# Altium PCB Atmel AVR consumer electronics control board.PcbDoc (part 1 of 4)
Units mm, origin at the board's own origin, x right, y up, seen from the top; angles counter-clockwise.
Board outline 310.13 x 89.13 mm, 2 copper layers (Top Layer, Top, Bottom Layer, Bottom); 455 components, 162 nets, 940 pads, 0 vias.
Unrouted connection lines stored in the file: 21.
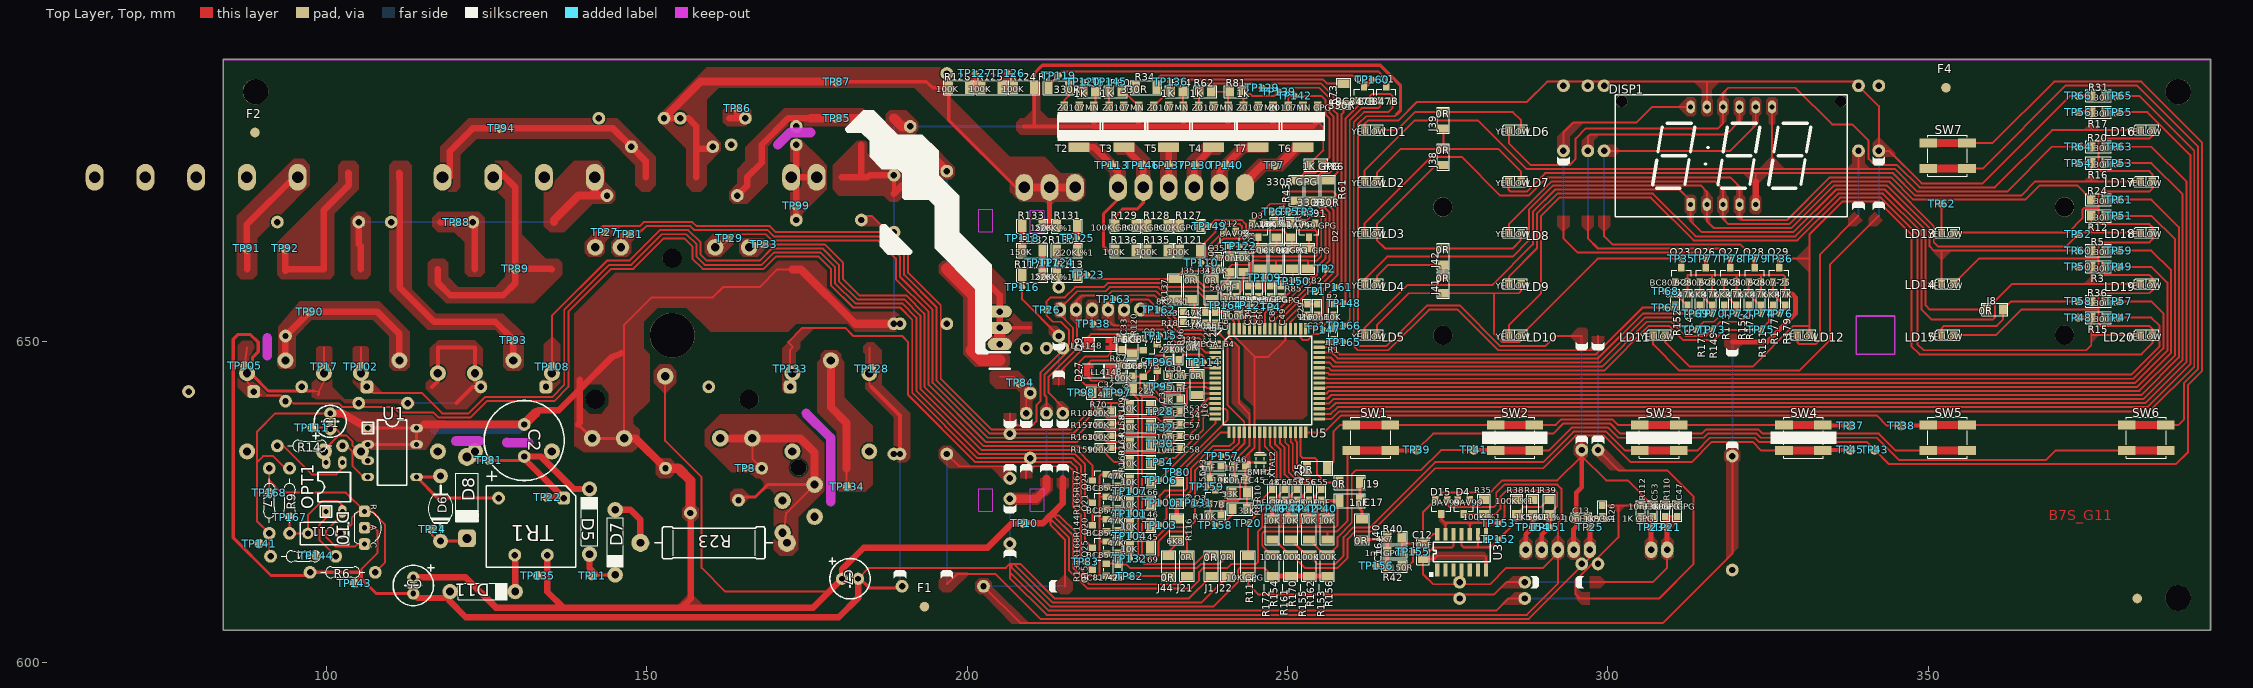
[diagram p0: Top Layer, Top view]
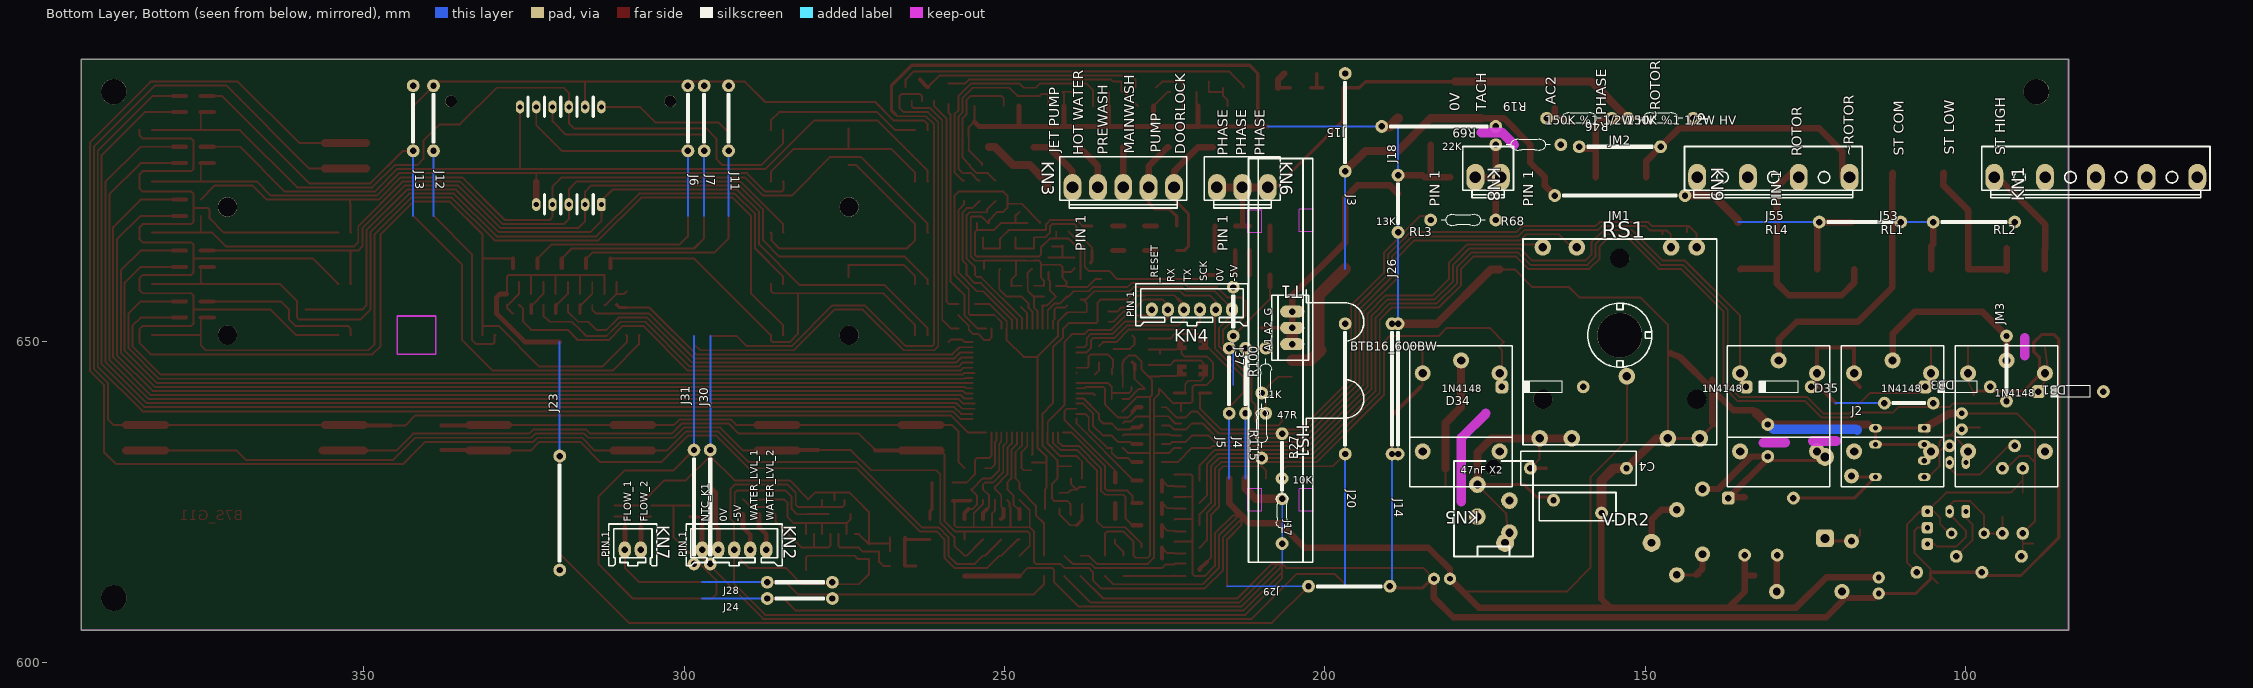
[diagram p1: Bottom Layer, Bottom view, seen from below]

## Layer stack, top to bottom
Top Solder, Top Mask: solder mask 0.0102, Solder Resist, Dk 3.5
Top Layer, Top: signal copper 0.0356
Dielectric 1: dielectric 0.32, FR-4, Dk 4.8
Bottom Layer, Bottom: signal copper 0.0356
Bottom Solder, Bot Mask: solder mask 0.0102, Solder Resist, Dk 3.5

## Board outline
83.936,605 84,604.936 394,604.936 394.063,605 394.063,694 394,694.063 84,694.063 83.936,694

## Design rules (kind name [scope] priority, off if disabled: settings)
Clearance [All] p1: gap=0.254 ignorepadtopadclearanceinfootprint=FALSE except(0: Arc-Hole Track-Hole SMDPad-Hole THPad-Hole Via-Hole Fill-Hole Poly-Hole Region-Hole Text-Hole; 0.305: Arc-Arc Arc-Track Arc-THPad Arc-Via Track-Track Track-THPad Track-Via THPad-THPad THPad-Via Via-Via)
PlaneClearance [All] p1: clearance=0.254
PolygonConnect PolygonConnect_126 [IsPolygon And InNet('JET_POMPASI') And OnLayer('Top Layer, Top') vs IsVia] p1: connectstyle=Direct reliefconductorwidth=0.381 reliefentries=4 polygonreliefangle="90 Angle" airgapwidth=0.254
PolygonConnect PolygonConnect_125 [IsPolygon And InNet('JET_POMPASI') And OnLayer('Top Layer, Top') vs IsPad] p2: connectstyle=Direct reliefconductorwidth=0.381 reliefentries=4 polygonreliefangle="90 Angle" airgapwidth=0.254
PolygonConnect PolygonConnect_124 [IsPolygon And InNet('DOORLOCK') And OnLayer('Top Layer, Top') vs IsVia] p3: connectstyle=Direct reliefconductorwidth=0.381 reliefentries=4 polygonreliefangle="90 Angle" airgapwidth=0.254
PolygonConnect PolygonConnect_123 [IsPolygon And InNet('DOORLOCK') And OnLayer('Top Layer, Top') vs IsPad] p4: connectstyle=Direct reliefconductorwidth=0.381 reliefentries=4 polygonreliefangle="90 Angle" airgapwidth=0.254
PolygonConnect PolygonConnect_122 [IsPolygon And InNet('STATOR_COM') And OnLayer('Top Layer, Top') vs IsVia] p5: connectstyle=Direct reliefconductorwidth=0.381 reliefentries=4 polygonreliefangle="90 Angle" airgapwidth=0.254
PolygonConnect PolygonConnect_121 [IsPolygon And InNet('STATOR_COM') And OnLayer('Top Layer, Top') vs IsPad] p6: connectstyle=Direct reliefconductorwidth=0.381 reliefentries=4 polygonreliefangle="90 Angle" airgapwidth=0.254
PolygonConnect PolygonConnect_120 [IsPolygon And InNet('STATOR_LOW_SPEED') And OnLayer('Top Layer, Top') vs IsVia] p7: connectstyle=Direct reliefconductorwidth=0.381 reliefentries=4 polygonreliefangle="90 Angle" airgapwidth=0.254
PolygonConnect PolygonConnect_119 [IsPolygon And InNet('STATOR_LOW_SPEED') And OnLayer('Top Layer, Top') vs IsPad] p8: connectstyle=Direct reliefconductorwidth=0.381 reliefentries=4 polygonreliefangle="90 Angle" airgapwidth=0.254
PolygonConnect PolygonConnect_118 [IsPolygon And InNet('STATOR_HIGH_SPEED') And OnLayer('Top Layer, Top') vs IsVia] p9: connectstyle=Direct reliefconductorwidth=0.381 reliefentries=4 polygonreliefangle="90 Angle" airgapwidth=0.254
PolygonConnect PolygonConnect_117 [IsPolygon And InNet('STATOR_HIGH_SPEED') And OnLayer('Top Layer, Top') vs IsPad] p10: connectstyle=Direct reliefconductorwidth=0.381 reliefentries=4 polygonreliefangle="90 Angle" airgapwidth=0.254
PolygonConnect PolygonConnect_116 [IsPolygon And InNet('ROTOR') And OnLayer('Top Layer, Top') vs IsVia] p11: connectstyle=Direct reliefconductorwidth=0.381 reliefentries=4 polygonreliefangle="90 Angle" airgapwidth=0.254
PolygonConnect PolygonConnect_115 [IsPolygon And InNet('ROTOR') And OnLayer('Top Layer, Top') vs IsPad] p12: connectstyle=Direct reliefconductorwidth=0.381 reliefentries=4 polygonreliefangle="90 Angle" airgapwidth=0.254
PolygonConnect PolygonConnect_114 [IsPolygon And InNet('NET00056') And OnLayer('Top Layer, Top') vs IsVia] p13: connectstyle=Direct reliefconductorwidth=0.381 reliefentries=4 polygonreliefangle="90 Angle" airgapwidth=0.254
PolygonConnect PolygonConnect_113 [IsPolygon And InNet('NET00056') And OnLayer('Top Layer, Top') vs IsPad] p14: connectstyle=Direct reliefconductorwidth=0.381 reliefentries=4 polygonreliefangle="90 Angle" airgapwidth=0.254
PolygonConnect PolygonConnect_112 [IsPolygon And InNet('NET00047') And OnLayer('Top Layer, Top') vs IsVia] p15: connectstyle=Direct reliefconductorwidth=0.381 reliefentries=4 polygonreliefangle="90 Angle" airgapwidth=0.254
PolygonConnect PolygonConnect_111 [IsPolygon And InNet('NET00047') And OnLayer('Top Layer, Top') vs IsPad] p16: connectstyle=Direct reliefconductorwidth=0.381 reliefentries=4 polygonreliefangle="90 Angle" airgapwidth=0.254
PolygonConnect PolygonConnect_110 [IsPolygon And InNet('NET00055') And OnLayer('Top Layer, Top') vs IsVia] p17: connectstyle=Direct reliefconductorwidth=0.381 reliefentries=4 polygonreliefangle="90 Angle" airgapwidth=0.254
PolygonConnect PolygonConnect_109 [IsPolygon And InNet('NET00055') And OnLayer('Top Layer, Top') vs IsPad] p18: connectstyle=Direct reliefconductorwidth=0.381 reliefentries=4 polygonreliefangle="90 Angle" airgapwidth=0.254
PolygonConnect PolygonConnect_108 [IsPolygon And InNet('HEATER_P') And OnLayer('Top Layer, Top') vs IsVia] p19: connectstyle=Direct reliefconductorwidth=0.381 reliefentries=4 polygonreliefangle="90 Angle" airgapwidth=0.254
PolygonConnect PolygonConnect_107 [IsPolygon And InNet('HEATER_P') And OnLayer('Top Layer, Top') vs IsPad] p20: connectstyle=Direct reliefconductorwidth=0.381 reliefentries=4 polygonreliefangle="90 Angle" airgapwidth=0.254
PolygonConnect PolygonConnect_106 [IsPolygon And InNet('HOT_WATER') And OnLayer('Top Layer, Top') vs IsVia] p21: connectstyle=Direct reliefconductorwidth=0.381 reliefentries=4 polygonreliefangle="90 Angle" airgapwidth=0.254
PolygonConnect PolygonConnect_105 [IsPolygon And InNet('HOT_WATER') And OnLayer('Top Layer, Top') vs IsPad] p22: connectstyle=Direct reliefconductorwidth=0.381 reliefentries=4 polygonreliefangle="90 Angle" airgapwidth=0.254
PolygonConnect PolygonConnect_104 [IsPolygon And InNet('PREWASH') And OnLayer('Top Layer, Top') vs IsVia] p23: connectstyle=Direct reliefconductorwidth=0.381 reliefentries=4 polygonreliefangle="90 Angle" airgapwidth=0.254
PolygonConnect PolygonConnect_103 [IsPolygon And InNet('PREWASH') And OnLayer('Top Layer, Top') vs IsPad] p24: connectstyle=Direct reliefconductorwidth=0.381 reliefentries=4 polygonreliefangle="90 Angle" airgapwidth=0.254
PolygonConnect PolygonConnect_102 [IsPolygon And InNet('TAHLIYE_POMPASI') And OnLayer('Top Layer, Top') vs IsVia] p25: connectstyle=Direct reliefconductorwidth=0.381 reliefentries=4 polygonreliefangle="90 Angle" airgapwidth=0.254
PolygonConnect PolygonConnect_101 [IsPolygon And InNet('TAHLIYE_POMPASI') And OnLayer('Top Layer, Top') vs IsPad] p26: connectstyle=Direct reliefconductorwidth=0.381 reliefentries=4 polygonreliefangle="90 Angle" airgapwidth=0.254
PolygonConnect PolygonConnect_100 [IsPolygon And InNet('NET00024') And OnLayer('Top Layer, Top') vs IsVia] p27: connectstyle=Direct reliefconductorwidth=0.381 reliefentries=4 polygonreliefangle="90 Angle" airgapwidth=0.254
PolygonConnect PolygonConnect_99 [IsPolygon And InNet('NET00024') And OnLayer('Top Layer, Top') vs IsPad] p28: connectstyle=Direct reliefconductorwidth=0.381 reliefentries=4 polygonreliefangle="90 Angle" airgapwidth=0.254
PolygonConnect PolygonConnect_98 [IsPolygon And InNet('PHASE') And OnLayer('Top Layer, Top') vs IsVia] p29: connectstyle=Direct reliefconductorwidth=0.381 reliefentries=4 polygonreliefangle="90 Angle" airgapwidth=0.254
PolygonConnect PolygonConnect_97 [IsPolygon And InNet('PHASE') And OnLayer('Top Layer, Top') vs IsPad] p30: connectstyle=Direct reliefconductorwidth=0.381 reliefentries=4 polygonreliefangle="90 Angle" airgapwidth=0.254
PolygonConnect PolygonConnect_96 [IsPolygon And InNet('TACHO_K2') And OnLayer('Top Layer, Top') vs IsVia] p31: connectstyle=Direct reliefconductorwidth=0.381 reliefentries=4 polygonreliefangle="90 Angle" airgapwidth=0.254
PolygonConnect PolygonConnect_95 [IsPolygon And InNet('TACHO_K2') And OnLayer('Top Layer, Top') vs IsPad] p32: connectstyle=Direct reliefconductorwidth=0.381 reliefentries=4 polygonreliefangle="90 Angle" airgapwidth=0.254
PolygonConnect PolygonConnect_94 [IsPolygon And InNet('NET00096') And OnLayer('Top Layer, Top') vs IsVia] p33: connectstyle=Direct reliefconductorwidth=0.381 reliefentries=4 polygonreliefangle="90 Angle" airgapwidth=0.254
PolygonConnect PolygonConnect_93 [IsPolygon And InNet('NET00096') And OnLayer('Top Layer, Top') vs IsPad] p34: connectstyle=Direct reliefconductorwidth=0.381 reliefentries=4 polygonreliefangle="90 Angle" airgapwidth=0.254
PolygonConnect PolygonConnect_92 [IsPolygon And InNet('~ROTOR') And OnLayer('Top Layer, Top') vs IsVia] p35: connectstyle=Direct reliefconductorwidth=0.381 reliefentries=4 polygonreliefangle="90 Angle" airgapwidth=0.254
PolygonConnect PolygonConnect_91 [IsPolygon And InNet('~ROTOR') And OnLayer('Top Layer, Top') vs IsPad] p36: connectstyle=Direct reliefconductorwidth=0.381 reliefentries=4 polygonreliefangle="90 Angle" airgapwidth=0.254
PolygonConnect PolygonConnect_90 [IsPolygon And InNet('NET00045') And OnLayer('Top Layer, Top') vs IsVia] p37: connectstyle=Direct reliefconductorwidth=0.381 reliefentries=4 polygonreliefangle="90 Angle" airgapwidth=0.254
PolygonConnect PolygonConnect_89 [IsPolygon And InNet('NET00045') And OnLayer('Top Layer, Top') vs IsPad] p38: connectstyle=Direct reliefconductorwidth=0.381 reliefentries=4 polygonreliefangle="90 Angle" airgapwidth=0.254
PolygonConnect PolygonConnect_88 [IsPolygon And InNet('NET00028') And OnLayer('Top Layer, Top') vs IsVia] p39: connectstyle=Direct reliefconductorwidth=0.381 reliefentries=4 polygonreliefangle="90 Angle" airgapwidth=0.254
PolygonConnect PolygonConnect_87 [IsPolygon And InNet('NET00028') And OnLayer('Top Layer, Top') vs IsPad] p40: connectstyle=Direct reliefconductorwidth=0.381 reliefentries=4 polygonreliefangle="90 Angle" airgapwidth=0.254
PolygonConnect PolygonConnect_86 [IsPolygon And InNet('SUTUN_3') And OnLayer('Top Layer, Top') vs IsVia] p41: connectstyle=Direct reliefconductorwidth=0.381 reliefentries=4 polygonreliefangle="90 Angle" airgapwidth=0.254
PolygonConnect PolygonConnect_85 [IsPolygon And InNet('SUTUN_3') And OnLayer('Top Layer, Top') vs IsPad] p42: connectstyle=Direct reliefconductorwidth=0.381 reliefentries=4 polygonreliefangle="90 Angle" airgapwidth=0.254
PolygonConnect PolygonConnect_84 [IsPolygon And InNet('SUTUN_5') And OnLayer('Top Layer, Top') vs IsVia] p43: connectstyle=Direct reliefconductorwidth=0.381 reliefentries=4 polygonreliefangle="90 Angle" airgapwidth=0.254
PolygonConnect PolygonConnect_83 [IsPolygon And InNet('SUTUN_5') And OnLayer('Top Layer, Top') vs IsPad] p44: connectstyle=Direct reliefconductorwidth=0.381 reliefentries=4 polygonreliefangle="90 Angle" airgapwidth=0.254
PolygonConnect PolygonConnect_82 [IsPolygon And InNet('K_SU_SEVIYE_1') And OnLayer('Top Layer, Top') vs IsVia] p45: connectstyle=Direct reliefconductorwidth=0.381 reliefentries=4 polygonreliefangle="90 Angle" airgapwidth=0.254
PolygonConnect PolygonConnect_81 [IsPolygon And InNet('K_SU_SEVIYE_1') And OnLayer('Top Layer, Top') vs IsPad] p46: connectstyle=Direct reliefconductorwidth=0.381 reliefentries=4 polygonreliefangle="90 Angle" airgapwidth=0.254
PolygonConnect PolygonConnect_80 [IsPolygon And InNet('TX') And OnLayer('Top Layer, Top') vs IsVia] p47: connectstyle=Direct reliefconductorwidth=0.381 reliefentries=4 polygonreliefangle="90 Angle" airgapwidth=0.254
PolygonConnect PolygonConnect_79 [IsPolygon And InNet('TX') And OnLayer('Top Layer, Top') vs IsPad] p48: connectstyle=Direct reliefconductorwidth=0.381 reliefentries=4 polygonreliefangle="90 Angle" airgapwidth=0.254
PolygonConnect PolygonConnect_78 [IsPolygon And InNet('SCK') And OnLayer('Top Layer, Top') vs IsVia] p49: connectstyle=Direct reliefconductorwidth=0.381 reliefentries=4 polygonreliefangle="90 Angle" airgapwidth=0.254
PolygonConnect PolygonConnect_77 [IsPolygon And InNet('SCK') And OnLayer('Top Layer, Top') vs IsPad] p50: connectstyle=Direct reliefconductorwidth=0.381 reliefentries=4 polygonreliefangle="90 Angle" airgapwidth=0.254
PolygonConnect PolygonConnect_76 [IsPolygon And InNet('_RESET') And OnLayer('Top Layer, Top') vs IsVia] p51: connectstyle=Direct reliefconductorwidth=0.381 reliefentries=4 polygonreliefangle="90 Angle" airgapwidth=0.254
PolygonConnect PolygonConnect_75 [IsPolygon And InNet('_RESET') And OnLayer('Top Layer, Top') vs IsPad] p52: connectstyle=Direct reliefconductorwidth=0.381 reliefentries=4 polygonreliefangle="90 Angle" airgapwidth=0.254
PolygonConnect PolygonConnect_74 [IsPolygon And InNet('AC2') And OnLayer('Top Layer, Top') vs IsVia] p53: connectstyle=Direct reliefconductorwidth=0.381 reliefentries=4 polygonreliefangle="90 Angle" airgapwidth=0.254
PolygonConnect PolygonConnect_73 [IsPolygon And InNet('AC2') And OnLayer('Top Layer, Top') vs IsPad] p54: connectstyle=Direct reliefconductorwidth=0.381 reliefentries=4 polygonreliefangle="90 Angle" airgapwidth=0.254
PolygonConnect PolygonConnect_72 [IsPolygon And InNet('P') And OnLayer('Top Layer, Top') vs IsVia] p55: connectstyle=Direct reliefconductorwidth=0.381 reliefentries=4 polygonreliefangle="90 Angle" airgapwidth=0.254
PolygonConnect PolygonConnect_71 [IsPolygon And InNet('P') And OnLayer('Top Layer, Top') vs IsPad] p56: connectstyle=Direct reliefconductorwidth=0.381 reliefentries=4 polygonreliefangle="90 Angle" airgapwidth=0.254
PolygonConnect PolygonConnect_70 [IsPolygon And InNet('_SATIR_2') And OnLayer('Top Layer, Top') vs IsVia] p57: connectstyle=Direct reliefconductorwidth=0.381 reliefentries=4 polygonreliefangle="90 Angle" airgapwidth=0.254
PolygonConnect PolygonConnect_69 [IsPolygon And InNet('_SATIR_2') And OnLayer('Top Layer, Top') vs IsPad] p58: connectstyle=Direct reliefconductorwidth=0.381 reliefentries=4 polygonreliefangle="90 Angle" airgapwidth=0.254
PolygonConnect PolygonConnect_68 [IsPolygon And InNet('NET00006') And OnLayer('Top Layer, Top') vs IsVia] p59: connectstyle=Direct reliefconductorwidth=0.381 reliefentries=4 polygonreliefangle="90 Angle" airgapwidth=0.254
PolygonConnect PolygonConnect_67 [IsPolygon And InNet('NET00006') And OnLayer('Top Layer, Top') vs IsPad] p60: connectstyle=Direct reliefconductorwidth=0.381 reliefentries=4 polygonreliefangle="90 Angle" airgapwidth=0.254
PolygonConnect PolygonConnect_66 [IsPolygon And InNet('NET00016') And OnLayer('Top Layer, Top') vs IsVia] p61: connectstyle=Direct reliefconductorwidth=0.381 reliefentries=4 polygonreliefangle="90 Angle" airgapwidth=0.254
PolygonConnect PolygonConnect_65 [IsPolygon And InNet('NET00016') And OnLayer('Top Layer, Top') vs IsPad] p62: connectstyle=Direct reliefconductorwidth=0.381 reliefentries=4 polygonreliefangle="90 Angle" airgapwidth=0.254
PolygonConnect PolygonConnect_64 [IsPolygon And InNet('NET00077') And OnLayer('Top Layer, Top') vs IsVia] p63: connectstyle=Direct reliefconductorwidth=0.381 reliefentries=4 polygonreliefangle="90 Angle" airgapwidth=0.254
PolygonConnect PolygonConnect_63 [IsPolygon And InNet('NET00077') And OnLayer('Top Layer, Top') vs IsPad] p64: connectstyle=Direct reliefconductorwidth=0.381 reliefentries=4 polygonreliefangle="90 Angle" airgapwidth=0.254
PolygonConnect PolygonConnect_62 [IsPolygon And InNet('NTC') And OnLayer('Top Layer, Top') vs IsVia] p65: connectstyle=Direct reliefconductorwidth=0.381 reliefentries=4 polygonreliefangle="90 Angle" airgapwidth=0.254
PolygonConnect PolygonConnect_61 [IsPolygon And InNet('NTC') And OnLayer('Top Layer, Top') vs IsPad] p66: connectstyle=Direct reliefconductorwidth=0.381 reliefentries=4 polygonreliefangle="90 Angle" airgapwidth=0.254
PolygonConnect PolygonConnect_60 [IsPolygon And InNet('NTC_K1') And OnLayer('Top Layer, Top') vs IsVia] p67: connectstyle=Direct reliefconductorwidth=0.381 reliefentries=4 polygonreliefangle="90 Angle" airgapwidth=0.254
PolygonConnect PolygonConnect_59 [IsPolygon And InNet('NTC_K1') And OnLayer('Top Layer, Top') vs IsPad] p68: connectstyle=Direct reliefconductorwidth=0.381 reliefentries=4 polygonreliefangle="90 Angle" airgapwidth=0.254
PolygonConnect PolygonConnect_58 [IsPolygon And InNet('_ROTARY_4') And OnLayer('Top Layer, Top') vs IsVia] p69: connectstyle=Direct reliefconductorwidth=0.381 reliefentries=4 polygonreliefangle="90 Angle" airgapwidth=0.254
PolygonConnect PolygonConnect_57 [IsPolygon And InNet('_ROTARY_4') And OnLayer('Top Layer, Top') vs IsPad] p70: connectstyle=Direct reliefconductorwidth=0.381 reliefentries=4 polygonreliefangle="90 Angle" airgapwidth=0.254
PolygonConnect PolygonConnect_56 [IsPolygon And InNet('_ROTARY_3') And OnLayer('Top Layer, Top') vs IsVia] p71: connectstyle=Direct reliefconductorwidth=0.381 reliefentries=4 polygonreliefangle="90 Angle" airgapwidth=0.254
PolygonConnect PolygonConnect_55 [IsPolygon And InNet('_ROTARY_3') And OnLayer('Top Layer, Top') vs IsPad] p72: connectstyle=Direct reliefconductorwidth=0.381 reliefentries=4 polygonreliefangle="90 Angle" airgapwidth=0.254
PolygonConnect PolygonConnect_54 [IsPolygon And InNet('_ROTARY_2') And OnLayer('Top Layer, Top') vs IsVia] p73: connectstyle=Direct reliefconductorwidth=0.381 reliefentries=4 polygonreliefangle="90 Angle" airgapwidth=0.254
PolygonConnect PolygonConnect_53 [IsPolygon And InNet('_ROTARY_2') And OnLayer('Top Layer, Top') vs IsPad] p74: connectstyle=Direct reliefconductorwidth=0.381 reliefentries=4 polygonreliefangle="90 Angle" airgapwidth=0.254
PolygonConnect PolygonConnect_52 [IsPolygon And InNet('_ROTARY_1') And OnLayer('Top Layer, Top') vs IsVia] p75: connectstyle=Direct reliefconductorwidth=0.381 reliefentries=4 polygonreliefangle="90 Angle" airgapwidth=0.254
PolygonConnect PolygonConnect_51 [IsPolygon And InNet('_ROTARY_1') And OnLayer('Top Layer, Top') vs IsPad] p76: connectstyle=Direct reliefconductorwidth=0.381 reliefentries=4 polygonreliefangle="90 Angle" airgapwidth=0.254
PolygonConnect PolygonConnect_50 [IsPolygon And InNet('MAINWASH') And OnLayer('Top Layer, Top') vs IsVia] p77: connectstyle=Direct reliefconductorwidth=0.381 reliefentries=4 polygonreliefangle="90 Angle" airgapwidth=0.254
PolygonConnect PolygonConnect_49 [IsPolygon And InNet('MAINWASH') And OnLayer('Top Layer, Top') vs IsPad] p78: connectstyle=Direct reliefconductorwidth=0.381 reliefentries=4 polygonreliefangle="90 Angle" airgapwidth=0.254
PolygonConnect PolygonConnect_48 [IsPolygon And InNet('NET00066') And OnLayer('Top Layer, Top') vs IsVia] p79: connectstyle=Direct reliefconductorwidth=0.381 reliefentries=4 polygonreliefangle="90 Angle" airgapwidth=0.254
PolygonConnect PolygonConnect_47 [IsPolygon And InNet('NET00066') And OnLayer('Top Layer, Top') vs IsPad] p80: connectstyle=Direct reliefconductorwidth=0.381 reliefentries=4 polygonreliefangle="90 Angle" airgapwidth=0.254
PolygonConnect PolygonConnect_46 [IsPolygon And InNet('_SATIR_4') And OnLayer('Top Layer, Top') vs IsVia] p81: connectstyle=Direct reliefconductorwidth=0.381 reliefentries=4 polygonreliefangle="90 Angle" airgapwidth=0.254
PolygonConnect PolygonConnect_45 [IsPolygon And InNet('_SATIR_4') And OnLayer('Top Layer, Top') vs IsPad] p82: connectstyle=Direct reliefconductorwidth=0.381 reliefentries=4 polygonreliefangle="90 Angle" airgapwidth=0.254
PolygonConnect PolygonConnect_44 [IsPolygon And InNet('K_FLOWM_2') And OnLayer('Top Layer, Top') vs IsVia] p83: connectstyle=Direct reliefconductorwidth=0.381 reliefentries=4 polygonreliefangle="90 Angle" airgapwidth=0.254
PolygonConnect PolygonConnect_43 [IsPolygon And InNet('K_FLOWM_2') And OnLayer('Top Layer, Top') vs IsPad] p84: connectstyle=Direct reliefconductorwidth=0.381 reliefentries=4 polygonreliefangle="90 Angle" airgapwidth=0.254
PolygonConnect PolygonConnect_42 [IsPolygon And InNet('K_SU_SEVIYE_2') And OnLayer('Top Layer, Top') vs IsVia] p85: connectstyle=Direct reliefconductorwidth=0.381 reliefentries=4 polygonreliefangle="90 Angle" airgapwidth=0.254
PolygonConnect PolygonConnect_41 [IsPolygon And InNet('K_SU_SEVIYE_2') And OnLayer('Top Layer, Top') vs IsPad] p86: connectstyle=Direct reliefconductorwidth=0.381 reliefentries=4 polygonreliefangle="90 Angle" airgapwidth=0.254
PolygonConnect PolygonConnect_40 [IsPolygon And InNet('RX') And OnLayer('Top Layer, Top') vs IsVia] p87: connectstyle=Direct reliefconductorwidth=0.381 reliefentries=4 polygonreliefangle="90 Angle" airgapwidth=0.254
PolygonConnect PolygonConnect_39 [IsPolygon And InNet('RX') And OnLayer('Top Layer, Top') vs IsPad] p88: connectstyle=Direct reliefconductorwidth=0.381 reliefentries=4 polygonreliefangle="90 Angle" airgapwidth=0.254
PolygonConnect PolygonConnect_38 [IsPolygon And InNet('NET00004') And OnLayer('Top Layer, Top') vs IsVia] p89: connectstyle=Direct reliefconductorwidth=0.381 reliefentries=4 polygonreliefangle="90 Angle" airgapwidth=0.254
PolygonConnect PolygonConnect_37 [IsPolygon And InNet('NET00004') And OnLayer('Top Layer, Top') vs IsPad] p90: connectstyle=Direct reliefconductorwidth=0.381 reliefentries=4 polygonreliefangle="90 Angle" airgapwidth=0.254
PolygonConnect PolygonConnect_36 [IsPolygon And InNet('220_LINE') And OnLayer('Top Layer, Top') vs IsVia] p91: connectstyle=Direct reliefconductorwidth=0.381 reliefentries=4 polygonreliefangle="90 Angle" airgapwidth=0.254
PolygonConnect PolygonConnect_35 [IsPolygon And InNet('220_LINE') And OnLayer('Top Layer, Top') vs IsPad] p92: connectstyle=Direct reliefconductorwidth=0.381 reliefentries=4 polygonreliefangle="90 Angle" airgapwidth=0.254
PolygonConnect PolygonConnect_34 [IsPolygon And InNet('SUTUN_9') And OnLayer('Top Layer, Top') vs IsVia] p93: connectstyle=Direct reliefconductorwidth=0.381 reliefentries=4 polygonreliefangle="90 Angle" airgapwidth=0.254
PolygonConnect PolygonConnect_33 [IsPolygon And InNet('SUTUN_9') And OnLayer('Top Layer, Top') vs IsPad] p94: connectstyle=Direct reliefconductorwidth=0.381 reliefentries=4 polygonreliefangle="90 Angle" airgapwidth=0.254
PolygonConnect PolygonConnect_32 [IsPolygon And InNet('SUTUN_10') And OnLayer('Top Layer, Top') vs IsVia] p95: connectstyle=Direct reliefconductorwidth=0.381 reliefentries=4 polygonreliefangle="90 Angle" airgapwidth=0.254
PolygonConnect PolygonConnect_31 [IsPolygon And InNet('SUTUN_10') And OnLayer('Top Layer, Top') vs IsPad] p96: connectstyle=Direct reliefconductorwidth=0.381 reliefentries=4 polygonreliefangle="90 Angle" airgapwidth=0.254
PolygonConnect PolygonConnect_30 [IsPolygon And InNet('SUTUN_2') And OnLayer('Top Layer, Top') vs IsVia] p97: connectstyle=Direct reliefconductorwidth=0.381 reliefentries=4 polygonreliefangle="90 Angle" airgapwidth=0.254
PolygonConnect PolygonConnect_29 [IsPolygon And InNet('SUTUN_2') And OnLayer('Top Layer, Top') vs IsPad] p98: connectstyle=Direct reliefconductorwidth=0.381 reliefentries=4 polygonreliefangle="90 Angle" airgapwidth=0.254
PolygonConnect PolygonConnect_28 [IsPolygon And InNet('SUTUN_7') And OnLayer('Top Layer, Top') vs IsVia] p99: connectstyle=Direct reliefconductorwidth=0.381 reliefentries=4 polygonreliefangle="90 Angle" airgapwidth=0.254
PolygonConnect PolygonConnect_27 [IsPolygon And InNet('SUTUN_7') And OnLayer('Top Layer, Top') vs IsPad] p100: connectstyle=Direct reliefconductorwidth=0.381 reliefentries=4 polygonreliefangle="90 Angle" airgapwidth=0.254
PolygonConnect PolygonConnect_26 [IsPolygon And InNet('SUTUN_1') And OnLayer('Top Layer, Top') vs IsVia] p101: connectstyle=Direct reliefconductorwidth=0.381 reliefentries=4 polygonreliefangle="90 Angle" airgapwidth=0.254
PolygonConnect PolygonConnect_25 [IsPolygon And InNet('SUTUN_1') And OnLayer('Top Layer, Top') vs IsPad] p102: connectstyle=Direct reliefconductorwidth=0.381 reliefentries=4 polygonreliefangle="90 Angle" airgapwidth=0.254
PolygonConnect PolygonConnect_24 [IsPolygon And InNet('SUTUN_6') And OnLayer('Top Layer, Top') vs IsVia] p103: connectstyle=Direct reliefconductorwidth=0.381 reliefentries=4 polygonreliefangle="90 Angle" airgapwidth=0.254
PolygonConnect PolygonConnect_23 [IsPolygon And InNet('SUTUN_6') And OnLayer('Top Layer, Top') vs IsPad] p104: connectstyle=Direct reliefconductorwidth=0.381 reliefentries=4 polygonreliefangle="90 Angle" airgapwidth=0.254
PolygonConnect PolygonConnect_22 [IsPolygon And InNet('SUTUN_4') And OnLayer('Top Layer, Top') vs IsVia] p105: connectstyle=Direct reliefconductorwidth=0.381 reliefentries=4 polygonreliefangle="90 Angle" airgapwidth=0.254
PolygonConnect PolygonConnect_21 [IsPolygon And InNet('SUTUN_4') And OnLayer('Top Layer, Top') vs IsPad] p106: connectstyle=Direct reliefconductorwidth=0.381 reliefentries=4 polygonreliefangle="90 Angle" airgapwidth=0.254
PolygonConnect PolygonConnect_20 [IsPolygon And InNet('SUTUN_8') And OnLayer('Top Layer, Top') vs IsVia] p107: connectstyle=Direct reliefconductorwidth=0.381 reliefentries=4 polygonreliefangle="90 Angle" airgapwidth=0.254
PolygonConnect PolygonConnect_19 [IsPolygon And InNet('SUTUN_8') And OnLayer('Top Layer, Top') vs IsPad] p108: connectstyle=Direct reliefconductorwidth=0.381 reliefentries=4 polygonreliefangle="90 Angle" airgapwidth=0.254
PolygonConnect PolygonConnect_18 [IsPolygon And InNet('_SATIR_3') And OnLayer('Top Layer, Top') vs IsVia] p109: connectstyle=Direct reliefconductorwidth=0.381 reliefentries=4 polygonreliefangle="90 Angle" airgapwidth=0.254
PolygonConnect PolygonConnect_17 [IsPolygon And InNet('_SATIR_3') And OnLayer('Top Layer, Top') vs IsPad] p110: connectstyle=Direct reliefconductorwidth=0.381 reliefentries=4 polygonreliefangle="90 Angle" airgapwidth=0.254
PolygonConnect PolygonConnect_16 [IsPolygon And InNet('-5V') And OnLayer('Top Layer, Top') vs IsVia] p111: connectstyle=Direct reliefconductorwidth=0.381 reliefentries=4 polygonreliefangle="90 Angle" airgapwidth=0.254
PolygonConnect PolygonConnect_15 [IsPolygon And InNet('-5V') And OnLayer('Top Layer, Top') vs IsPad] p112: connectstyle=Direct reliefconductorwidth=0.381 reliefentries=4 polygonreliefangle="90 Angle" airgapwidth=0.254
PolygonConnect PolygonConnect_14 [IsPolygon And InNet('_SATIR_1') And OnLayer('Top Layer, Top') vs IsVia] p113: connectstyle=Direct reliefconductorwidth=0.381 reliefentries=4 polygonreliefangle="90 Angle" airgapwidth=0.254
PolygonConnect PolygonConnect_13 [IsPolygon And InNet('_SATIR_1') And OnLayer('Top Layer, Top') vs IsPad] p114: connectstyle=Direct reliefconductorwidth=0.381 reliefentries=4 polygonreliefangle="90 Angle" airgapwidth=0.254
PolygonConnect PolygonConnect_12 [IsPolygon And InNet('K_FLOWM_1') And OnLayer('Top Layer, Top') vs IsVia] p115: connectstyle=Direct reliefconductorwidth=0.381 reliefentries=4 polygonreliefangle="90 Angle" airgapwidth=0.254
PolygonConnect PolygonConnect_11 [IsPolygon And InNet('K_FLOWM_1') And OnLayer('Top Layer, Top') vs IsPad] p116: connectstyle=Direct reliefconductorwidth=0.381 reliefentries=4 polygonreliefangle="90 Angle" airgapwidth=0.254
PolygonConnect PolygonConnect_10 [IsPolygon And InNet('NET00000') And OnLayer('Top Layer, Top') vs IsVia] p117: connectstyle=Direct reliefconductorwidth=0.381 reliefentries=4 polygonreliefangle="90 Angle" airgapwidth=0.254
PolygonConnect PolygonConnect_9 [IsPolygon And InNet('NET00000') And OnLayer('Top Layer, Top') vs IsPad] p118: connectstyle=Direct reliefconductorwidth=0.381 reliefentries=4 polygonreliefangle="90 Angle" airgapwidth=0.254
PolygonConnect PolygonConnect_8 [IsPolygon And InNet('NET00035') And OnLayer('Top Layer, Top') vs IsVia] p119: connectstyle=Direct reliefconductorwidth=0.381 reliefentries=4 polygonreliefangle="90 Angle" airgapwidth=0.254
PolygonConnect PolygonConnect_7 [IsPolygon And InNet('NET00035') And OnLayer('Top Layer, Top') vs IsPad] p120: connectstyle=Direct reliefconductorwidth=0.381 reliefentries=4 polygonreliefangle="90 Angle" airgapwidth=0.254
PolygonConnect PolygonConnect_6 [IsPolygon And InNet('NET00017') And OnLayer('Top Layer, Top') vs IsVia] p121: connectstyle=Direct reliefconductorwidth=0.381 reliefentries=4 polygonreliefangle="90 Angle" airgapwidth=0.254
PolygonConnect PolygonConnect_5 [IsPolygon And InNet('NET00017') And OnLayer('Top Layer, Top') vs IsPad] p122: connectstyle=Direct reliefconductorwidth=0.381 reliefentries=4 polygonreliefangle="90 Angle" airgapwidth=0.254
PolygonConnect PolygonConnect_4 [IsPolygon And InNet('NET00074') And OnLayer('Top Layer, Top') vs IsVia] p123: connectstyle=Direct reliefconductorwidth=0.381 reliefentries=4 polygonreliefangle="90 Angle" airgapwidth=0.254
PolygonConnect PolygonConnect_3 [IsPolygon And InNet('NET00074') And OnLayer('Top Layer, Top') vs IsPad] p124: connectstyle=Direct reliefconductorwidth=0.381 reliefentries=4 polygonreliefangle="90 Angle" airgapwidth=0.254
PolygonConnect PolygonConnect_2 [IsPolygon And InNet('0V') And OnLayer('Top Layer, Top') vs IsVia] p125: connectstyle=Direct reliefconductorwidth=0.381 reliefentries=4 polygonreliefangle="90 Angle" airgapwidth=0.254
PolygonConnect PolygonConnect_1 [IsPolygon And InNet('0V') And OnLayer('Top Layer, Top') vs IsPad] p126: connectstyle=Direct reliefconductorwidth=0.381 reliefentries=4 polygonreliefangle="90 Angle" airgapwidth=0.254
PolygonConnect [All] p127: connectstyle=Relief reliefconductorwidth=0.254 reliefentries=4 polygonreliefangle="90 Angle" airgapwidth=0.254
RoutingVias [All] p1: holewidth=0.711 width=1.27 viastyle="Through Hole" minholewidth=0.711 minwidth=1.27 maxholewidth=0.711 maxwidth=1.27
SolderMaskExpansion [All] p1: expansion=0.102
Width [All] p1: maxlimit=0.254 minlimit=0.254 preferedwidth=0.254
29 further rules are at their usual default settings.

## Components (designator, comment, footprint, x,y, rotation, side; value= is the part's Value field where it differs from the comment)
C1 "10UF 25V M85" "CER F2.5 D5 H11_Radial" 100.647,638.81 r270 top
C2 "10uF 450V 105C HRL" "CER F5 D12.5 H25" 130.909,637.07 r270 top
C4 "47nF X2" "CFR F15 L18 B5.3 H11_Primary" 167.957,630.237 r180 bottom
C5 "220UF 16V M105" "CER F2.5 D6.3 H11_Primary" 113.6,610.7 r90 top
C6 "100nF" C_0603 242.316,654.24 r180 top
C7 "220UF 16V M105" "CER F2.5 D6.3 H11_Primary" 183,613 r180 top
C8 "10nF GPG" C_0603 247.332,656.908 r90 top
C10 "10nF" C_0603 243.84,656.908 r90 top
C11 "100nF 63V 5%" "CFR F5 L7.5 B3.5 H12.5_Vertical" 102.235,620.077 r180 top
C12 "10nF" C_0805_SIE_0805 271.145,618.49 r270 top
C13 "10nF GPG" C_0603 296.863,622.617 r180 top
C15 "560pF" C_0603 240.347,658.812 r270 top
C16 "1nF GPG" C_0805_SIE_0805 265.43,617.22 r0 top
C17 "1nF" C_1206_SIE_1206 261.303,625.158 r180 top
C23 "100nF" C_0603 237.172,652.78 r90 top
C27 "100nF" C_0603 254.635,654.05 r90 top
C28 "1nF" C_0603 238.76,652.78 r90 top
C29 "1nF" C_0603 253.047,654.05 r90 top
C30 "10nF" C_0603 233.362,644.842 r180 top
C31 "1nF" C_0603 233.362,642.938 r180 top
C32 "100nF" C_0603 225.742,646.43 r270 top
C33 "1nF" C_0603 224.155,650.558 r270 top
C34 "10nF" C_0603 241.935,656.908 r90 top
C35 "470nF" C_0805_SIE_0805 240.982,663.257 r270 top
C43 "1nF" C_0603 237.807,630.555 r0 top
C45 "100nF" C_0603 241.617,628.65 r0 top
C46 "1nF" C_0603 241.617,630.555 r0 top
C47 "10nF GPG" C_0603 310.832,624.522 r270 top
C48 "1nF GPG" C_0603 247.65,625.158 r90 top
C49 "560pF GPG" C_0603 248.92,656.908 r90 top
C50 "560pF" C_0603 245.427,656.908 r90 top
C53 "10nF GPG" C_0603 307.022,624.522 r270 top
C54 "10nF" C_0603 231.457,639.127 r0 top
C55 "10nF" C_0603 255.27,625.158 r90 top
C56 "10nF" C_0603 253.365,625.158 r90 top
C57 "10nF" C_0603 231.457,637.222 r0 top
C58 "10nF" C_0603 231.457,633.413 r0 top
C59 "10nF" C_0603 251.46,625.158 r90 top
C60 "10nF" C_0603 231.457,635.317 r0 top
C61 "10nF" C_0603 249.555,625.158 r90 top
D2 "BAV99 GPG" SOT_23(AKC)_IPC_210 254.317,668.337 r180 top
D3 "BAV99" SOT_23(AKC)_IPC_210 246.38,668.337 r180 top
D4 "BAV99" SOT_23(AKC)_IPC_210 278.447,625.158 r180 top
D5 "1N4007" DO_41_400_MIL 141.1,627 r270 top
D6 "GPG" SOD_57_400_MIL 117.856,618.871 r90 top
D7 "1N4007" DO_41_400_MIL 145.1,613.6 r90 top
D8 "GPG" DO_15_500_MIL 121.983,619.315 r90 top
D9 "LL4148" MINI_MELF_POL_Detent 219.075,649.605 r0 top
D10 "TL431 %1" TO_92(RAC) 106,623.5 r270 top
D11 "SB160" DO_41_400_MIL 129.5,611 r180 top
D12 "BAV99" SOT_23(AKC)_IPC_210 241.935,667.067 r180 top
D15 "BAV99" SOT_23(AKC)_IPC_210 274.955,625.158 r180 top
D27 "LL4148" MINI_MELF_POL_Detent 222.25,645.477 r180 top
D31 "1N4148" DO_35_400_MIL 88.7,642.2 r180 bottom
D33 "1N4148" DO_35_400_MIL 106.362,642.938 r180 bottom
D34 "1N4148" DO_35_500_MIL 172.403,642.938 r180 bottom
D35 "1N4148" DO_35_400_MIL 134.302,642.938 r180 bottom
DISP1 "3HSY81421B AMBER" "3HSY81426B4_3HSY81426B4 AMB(Primary)" 312.9,671.38 r0 top locked
F1 "FIDUCIAL_1.5_3R" FIDUCIAL_1.5_3R 193.357,608.647 r0 top
F2 "FIDUCIAL_1.5_3R" FIDUCIAL_1.5_3R 88.9,682.625 r0 top
F4 "FIDUCIAL_1.5_3R" FIDUCIAL_1.5_3R 352.743,689.61 r0 top
HS1 "*" HS_63_10_Z0 201.93,647.065 r180 bottom locked
J1 "0R" J_1206 238.125,616.585 r270 top
J2 "0R" JMP_300 112.712,640.397 r180 bottom
J3 "0R" JMP_600_600_MIL 196.85,676.592 r90 bottom
J4 "0R" JMP_400 212.407,638.81 r90 bottom
J5 "0R" JMP_400 214.947,638.81 r90 bottom
J6 "0R" JMP_400 299.402,679.767 r90 bottom
J7 "0R" JMP_400 296.863,679.767 r90 bottom
J8 "0R" J_0805 359.092,655.002 r0 top
J9 "0R" J_1206 232.727,624.84 r90 top
J11 "0R" JMP_400 293.053,679.767 r90 bottom
J12 "0R" JMP_400 339.09,679.767 r90 bottom
J13 "0R" JMP_400 342.265,679.767 r90 bottom
J14 "0R" JMP_800 189.547,632.46 r90 bottom
J15 "0R" JMP_700 191.135,683.577 r180 bottom
J16 "0R" J_1206 235.903,644.842 r270 top
J17 "0R" JMP_400 206.692,625.475 r90 bottom
J18 "0R" JMP_350 188.595,675.957 r270 bottom
J19 "0R" J_1206 258.127,628.015 r0 top
J20 "0R" JMP_800 196.85,632.46 r90 bottom
J21 "0R" J_1206 234.315,616.585 r270 top
J22 "0R" J_1206 240.665,616.585 r270 top
J23 "0R" JMP_700 319.405,632.142 r270 bottom
J24 "0R" JMP_400 287.02,609.918 r180 bottom
J25 "0R" J_1206 253.047,630.237 r0 top
J26 "0R" JMP_800 188.595,652.78 r270 bottom
J28 "GPG" JMP_400 287.02,612.457 r180 bottom
J29 "0R" JMP_500 202.565,611.822 r180 bottom
J30 "0R" JMP_700 295.91,633.095 r270 bottom
J31 "0R" JMP_700 298.45,633.095 r270 bottom
J33 "0R" J_0805 235.267,649.288 r270 top
J34 "0R" J_1206 238.125,659.765 r270 top
J35 "0R" J_1206 234.95,659.765 r270 top
J37 "0R" JMP_300 214.312,650.875 r90 bottom
J38 "0R" J_0805 274.32,680.085 r270 top
J39 "0R" J_0805 274.32,685.8 r270 top
J40 "0R" J_1206 261.62,619.125 r90 top
J41 "0R" J_0805 274.32,660.082 r270 top
J42 "0R" J_0805 274.32,664.527 r270 top
J44 "0R" J_1206 231.457,613.41 r90 top
J53 "0R" JMP_500 105.093,668.655 r180 bottom
J55 "0R" JMP_500 122.872,668.655 r180 bottom
JM1 "0R" JMP_800 164.147,672.783 r180 bottom
JM2 "0R" JMP_500 160.338,680.402 r180 bottom
JM3 "0R" JMP_400 93.662,650.875 r270 bottom
KN1 "35979_0510" 35979_5 95.567,675.64 r180 bottom locked
KN2 "35312_0560" 35312_5 297.18,617.538 r180 bottom
KN3 "35978_0510" 35978_5 239.395,674.053 r180 bottom locked
KN4 "35312_0660" 35312_6 227.012,655.002 r180 bottom
KN5 "91999_0499" 91999_2_91999_0499(Primary) 176.213,627.697 r180 bottom
KN6 "35978_0310" 35978_3 216.852,674.053 r180 bottom locked
KN7 "35312_0260 GPG" 35312_2 309.245,617.538 r180 bottom
KN8 "35978_0210" 35978_2 176.53,675.64 r180 bottom locked
KN9 "35979_0410" 35979_4 141.922,675.64 r180 bottom locked
LD1 "YELLOW" LTST_0805_N 263,683 r0 top locked
LD2 "YELLOW" LTST_0805_N 263,675 r0 top locked
LD3 "YELLOW" LTST_0805_N 263,667 r0 top locked
LD4 "YELLOW" LTST_0805_N 263,659 r0 top locked
LD5 "YELLOW" LTST_0805_N 263,651 r0 top locked
LD6 "YELLOW" LTST_0805_N 285.5,683 r0 top locked
LD7 "YELLOW" LTST_0805_N 285.5,675 r0 top locked
LD8 "YELLOW" LTST_0805_N 285.5,667 r0 top locked
LD9 "YELLOW" LTST_0805_N 285.5,659 r0 top locked
LD10 "YELLOW" LTST_0805_N 285.5,651 r0 top locked
LD11 "YELLOW" LTST_0805_N 308,651 r0 top locked
LD12 "YELLOW" LTST_0805_N 330.5,651 r0 top locked
LD13 "YELLOW" LTST_0805_N 353,667 r0 top locked
LD14 "YELLOW" LTST_0805_N 353,659 r0 top locked
LD15 "YELLOW" LTST_0805_N 353,651 r0 top locked
LD16 "YELLOW" LTST_0805_N 384,683 r0 top locked
LD17 "YELLOW" LTST_0805_N 384,675 r0 top locked
LD18 "YELLOW" LTST_0805_N 384,667 r0 top locked
LD19 "YELLOW" LTST_0805_N 384,659 r0 top locked
LD20 "YELLOW" LTST_0805_N 384,651 r0 top locked
OPT1 "PC817A" DIP_4_300_MIL 100,623.5 r90 top
Q1 "BC847B" SOT_23(BEC)_IPC_210 264.477,687.705 r0 top
Q2 "BC847B" SOT_23(BEC)_IPC_210 260.985,687.705 r0 top
Q3 "BC857B" SOT_23(BEC)_IPC_210 237.807,624.84 r0 top
Q9 "BC847B" SOT_23(BEC)_IPC_210 227.647,650.558 r270 top
Q12 "BC857B" SOT_23(BEC)_IPC_210 227.647,646.43 r270 top
Q15 "BC817-25" SOT_23(BEC)_IPC_210 221.59,613.448 r90 top
Q20 "BC857B" SOT_23(BEC)_IPC_210 221.615,620.395 r90 top
Q21 "BC857B" SOT_23(BEC)_IPC_210 221.615,623.887 r90 top
Q23 "BC807-25" SOT_23(BEC)_IPC_210 310.515,659.447 r0 top
Q24 "BC857B" SOT_23(BEC)_IPC_210 221.615,627.38 r90 top
Q25 "BC857B" SOT_23(BEC)_IPC_210 221.615,616.902 r90 top
Q26 "BC807-25" SOT_23(BEC)_IPC_210 314.325,659.447 r0 top
Q27 "BC807-25" SOT_23(BEC)_IPC_210 318.135,659.447 r0 top
Q28 "BC807-25" SOT_23(BEC)_IPC_210 321.945,659.447 r0 top
Q29 "BC807-25" SOT_23(BEC)_IPC_210 325.755,659.447 r0 top
R1 "10K" R_0603 257.175,650.24 r90 top
R2 "10K" R_0603 257.175,654.05 r90 top
R3 "300R" R_0805_SIE_0805 377.825,661.67 r180 top
R4 "100R %5 1/4W FP" RES_0207_400_MIL 101.5,616.5 r180 top
R5 "300R" R_0805_SIE_0805 377.825,664.21 r180 top
R6 "10K %1 1/4W" RES_0207_400_MIL 97.5,614 r0 top
R7 "10K %1 1/4W" RES_0207_400_MIL 91.123,630.237 r270 top
R8 "33K" R_0805_SIE_0805 243.84,623.887 r180 top
R9 "1K %5 1/4W" RES_0207_400_MIL 94.297,620.077 r90 top
R10 "33K" R_0805_SIE_0805 241.3,626.428 r0 top
R11 "10K" R_0603 237.807,622.935 r0 top
R12 "300R" R_0805_SIE_0805 377.825,669.607 r180 top
R14 "10K %1 1/4W" RES_0207_400_MIL 92.392,633.73 r0 top
R15 "300R" R_0805_SIE_0805 377.825,653.732 r180 top
R16 "300R" R_0805_SIE_0805 377.825,677.862 r180 top
R17 "300R" R_0805_SIE_0805 377.825,685.8 r180 top
R18 "47K" R_0603 235.585,653.097 r180 top
R19 "150K %1 1/2W HV" RES_0207_400_MIL 165.417,684.847 r180 bottom
R20 "300R" R_0805_SIE_0805 377.825,680.402 r180 top
R21 "330R" R_1206_SIE_1206 215.9,689.61 r180 top
R23 "22R 2W WW" RES_0516 171.9,618.6 r180 top
R24 "300R" R_0805_SIE_0805 377.825,672.147 r180 top
R26 "1K5 %1" R_0603 299.085,622.617 r90 top
R27 "10K" RES_0207_400_MIL 206.692,628.65 r270 bottom
R31 "300R" R_0805_SIE_0805 377.825,688.34 r180 top
R34 "330R" R_1206_SIE_1206 226.377,689.61 r0 top
R35 "100K %1" R_0805_SIE_0805 280.67,622.935 r90 top
R36 "300R" R_0805_SIE_0805 377.825,656.272 r180 top
R38 "100K %1" R_0805_SIE_0805 285.75,625.475 r270 top
R39 "560R %1" R_0805_SIE_0805 290.83,622.935 r90 top
R40 "4K7" R_0805_SIE_0805 265.43,619.442 r0 top
R41 "1K5 %1" R_0805_SIE_0805 288.29,622.935 r90 top
R42 "150R" R_0805_SIE_0805 267.97,614.997 r180 top
R43 "330R GPG" R_1206_SIE_1206 251.397,675.132 r270 top
R46 "150K %1 1/2W HV" RES_0207_400_MIL 152.718,684.847 r180 bottom
R50 "1K" R_0805_IPC_102A 217.805,688.975 r0 top
R53 "1K" R_0603 231.457,641.033 r0 top
R55 "10K" R_0603 239.712,628.65 r180 top
R56 "22K" R_0805_SIE_0805 228.282,642.62 r180 top
R61 "330R" R_1206_SIE_1206 256.349,671.957 r90 top
R62 "1K" R_0805_IPC_102A 235.903,688.975 r0 top
R66 "18K %1 GPG" R_0805_SIE_0805 250.507,668.655 r270 top
R67 "100K" R_0603 224.155,644.525 r90 top
R68 "13K" RES_0207_400_MIL 183.515,668.972 r180 bottom
R69 "22K" RES_0207_400_MIL 173.355,680.72 r180 bottom
R70 "4K7" R_0805_SIE_0805 221.933,641.985 r180 top
R73 "330R" R_1206_SIE_1206 258.762,687.07 r90 top
R74 "1K" R_0805_IPC_102A 231.457,688.975 r0 top
R80 "1K" R_0805_IPC_102A 221.933,688.975 r0 top
R81 "1K" R_0805_IPC_102A 243.205,688.975 r180 top
R82 "18K %1 GPG" R_1206_SIE_1206 253.174,664.527 r270 top
R84 "18K %1" R_0805_SIE_0805 248.285,668.655 r270 top
R85 "18K %1" R_1206_SIE_1206 248.221,664.527 r270 top
R86 "1K GPG" R_0805_IPC_102A 255.714,677.545 r180 top
R88 "47K" R_0603 235.585,654.685 r180 top
R91 "330R" R_1206_SIE_1206 253.873,671.957 r90 top
R96 "10K" R_0603 233.045,648.97 r270 top
R97 "10K GPG" R_1206_SIE_1206 250.698,664.527 r270 top
R98 "10K" R_0805_SIE_0805 243.103,663.27 r270 top
R100 "1K" RES_0207_400_MIL 209.867,641.985 r270 bottom
R101 "330K" R_0603 239.077,661.352 r90 top
R102 "22K" R_0603 231.457,648.97 r270 top
R103 "10K" R_1206_SIE_1206 245.745,664.527 r270 top
R108 "100K" R_0603 220.662,639.127 r0 top
R109 "10K" R_1206_SIE_1206 225.425,639.762 r0 top
R110 "33K GPG" R_0603 308.928,624.522 r270 top
R111 "10K GPG" R_1206_SIE_1206 243.84,613.41 r90 top
R112 "1K GPG" R_0603 305.118,622.617 r90 top
R113 "220K %1" R_1206_SIE_1206 213.995,660.4 r0 top
R115 "47R" RES_0207_400_MIL 209.232,638.81 r90 bottom
R116 "6K8" R_1206_SIE_1206 232.727,619.125 r90 top
R117 "150K" R_1206_SIE_1206 211.772,660.4 r180 top
R120 "6K8" R_0805_SIE_0805 225.742,650.558 r270 top
R121 "100K" R_1206_SIE_1206 233.172,664.21 r0 top
R124 "100K" R_1206_SIE_1206 207.327,689.61 r0 top
R125 "100K" R_1206_SIE_1206 202.248,689.61 r0 top
R126 "100K" R_1206_SIE_1206 197.167,689.61 r0 top
R127 "100K GPG" R_1206_SIE_1206 233.172,668.02 r0 top
R128 "100K GPG" R_1206_SIE_1206 228.155,668.02 r0 top
R129 "100K GPG" R_1206_SIE_1206 223.139,668.02 r0 top
R130 "220K %1" R_1206_SIE_1206 217.17,664.21 r180 top
R131 "220K %1" R_1206_SIE_1206 213.995,668.02 r0 top
R132 "150K" R_1206_SIE_1206 208.597,664.21 r0 top
R133 "150K" R_1206_SIE_1206 211.772,668.02 r180 top
R134 "47K" R_0603 223.52,613.41 r90 top
R135 "100K" R_1206_SIE_1206 228.155,664.21 r0 top
R136 "100K" R_1206_SIE_1206 223.139,664.21 r0 top
R137 "8K2 %1" R_1206_SIE_1206 232.41,656.59 r90 top
R144 "47K" R_0603 223.52,622.3 r270 top
R145 "10K" R_1206_SIE_1206 225.425,621.347 r0 top
R146 "10K" R_1206_SIE_1206 225.425,624.84 r0 top
R148 "47K" R_0603 312.42,657.543 r270 top
R149 "47K" R_0603 316.23,657.543 r270 top
R150 "47K" R_0603 320.04,657.543 r270 top
R151 "47K" R_0603 323.85,657.543 r270 top
R152 "6K8" R_0603 310.515,657.543 r270 top
R153 "10K" R_1206_SIE_1206 256.222,622.3 r270 top
R154 "100K" R_1206_SIE_1206 247.65,616.585 r270 top
R155 "10K" R_1206_SIE_1206 253.365,622.3 r270 top
R156 "100K" R_1206_SIE_1206 256.222,616.585 r270 top
R157 "100K" R_0603 220.662,637.222 r0 top
R158 "10K" R_1206_SIE_1206 225.425,636.905 r0 top
R159 "100K" R_0603 220.662,633.413 r0 top
R160 "10K" R_1206_SIE_1206 225.425,631.19 r0 top
R161 "10K" R_1206_SIE_1206 250.507,622.3 r270 top
R162 "100K" R_1206_SIE_1206 253.365,616.585 r270 top
R163 "100K" R_0603 220.662,635.317 r0 top
R164 "10K" R_1206_SIE_1206 225.425,634.048 r0 top
R165 "47K" R_0603 223.52,625.793 r270 top
R166 "10K" R_1206_SIE_1206 225.425,628.332 r0 top
R167 "47K" R_0603 223.52,629.285 r270 top
R168 "47K" R_0603 223.52,618.808 r270 top
R169 "10K" R_1206_SIE_1206 225.425,617.855 r0 top
R170 "100K" R_1206_SIE_1206 250.507,616.585 r270 top
R171 "6K8" R_0603 314.325,657.543 r270 top
R172 "10K" R_1206_SIE_1206 247.65,622.3 r270 top
R173 "6K8" R_0603 318.135,657.543 r270 top
R175 "6K8" R_0603 321.945,657.543 r270 top
R177 "6K8" R_0603 325.755,657.543 r270 top
R179 "47K" R_0603 327.66,657.543 r270 top
RL1 "JS1-5V PICKUPV=70% A4KARTI OMRON" JS1 111.442,647.065 r270 bottom
RL2 "JS1-5V PICKUPV=70% A4KARTI OMRON" JS1 93.662,647.065 r270 bottom
RL3 "JS1-5V PICKUPV=70% A4KARTI OMRON" JS1 178.752,647.065 r270 bottom
RL4 "JS1-5V PICKUPV=70% A4KARTI OMRON" JS1 129.222,647.065 r270 bottom
RS1 "16 POSITIONS(15 + ON/OFF)" SDKZ1G0100_SDKZ1G0100(Primary) 154,651 r180 bottom locked
SW1 "160GF" DTSL_62 263,635 r270 top locked
SW2 "160GF" DTSL_62 285.5,635 r270 top locked
SW3 "160GF" DTSL_62 308,635 r270 top locked
SW4 "160GF" DTSL_62 330.5,635 r270 top locked
SW5 "160GF" DTSL_62 353,635 r270 top locked
SW6 "160GF" DTSL_62 384,635 r270 top locked
SW7 "160GF" DTSL_62 353,679 r90 top
T1 "BTB16_600BW" TO_220AB(A1A2G)_TO_220AB 205.105,649.605 r90 bottom
T2 "Z0107MN" SOT_223(A1A2G) 217.487,686.752 r180 top
T3 "Z0107MN" SOT_223(A1A2G) 224.472,686.752 r180 top
T4 "Z0107MN" SOT_223(A1A2G) 238.442,686.752 r180 top
T5 "Z0107MN" SOT_223(A1A2G) 231.457,686.752 r180 top
T6 "Z0107MN GPG" SOT_223(A1A2G) 252.412,686.752 r180 top
T7 "Z0107MN" SOT_223(A1A2G) 245.427,686.752 r180 top
TP1 "TESTPAD" TEST_PAD_1.25mm 254.317,657.86 r0 top
TP2 "TESTPAD" TEST_PAD_1.25mm 255.905,661.352 r0 top
TP3 "TESTPAD" TEST_PAD_1.25mm 252.73,670.242 r0 top
TP4 "TESTPAD" TEST_PAD_1.25mm 247.396,655.384 r270 top
TP5 "TESTPAD" TEST_PAD_1.25mm 250.19,670.242 r0 top
TP6 "TESTPAD" TEST_PAD_1.25mm 247.65,670.242 r0 top
TP7 "TESTPAD" TEST_PAD_1.50mm 247.968,677.545 r0 top
TP8 "TESTPAD" TEST_PAD_1.0mm 165.417,630.237 r0 top
TP10 "TESTPAD" TEST_PAD_1.50mm 208.915,621.665 r0 top
TP11 "TESTPAD" TEST_PAD_1.50mm 141.5,613.5 r90 top
TP17 "TESTPAD" TEST_PAD_1.50mm 99.695,646.112 r0 top
TP20 "TESTPAD" TEST_PAD_1.0mm 243.84,621.665 r0 top
TP21 "TESTPAD" TEST_PAD_1.25mm 309.245,621.03 r0 top
TP22 "TESTPAD" TEST_PAD_1.50mm 134.5,625.7 r90 top
TP23 "TESTPAD" TEST_PAD_1.25mm 306.705,621.03 r0 top
TP24 "TESTPAD" TEST_PAD_1.50mm 116.522,620.712 r0 top
TP25 "TESTPAD" TEST_PAD_1.25mm 297.18,621.03 r0 top
TP26 "TESTPAD" TEST_PAD_1.25mm 212.407,655.002 r0 top
TP27 "TESTPAD" TEST_PAD_1.25mm 143.51,667.067 r0 top
TP28 "TESTPAD" TEST_PAD_1.0mm 230.06,639.127 r0 top
TP29 "TESTPAD" TEST_PAD_1.25mm 162.877,666.115 r0 top
TP30 "TESTPAD" TEST_PAD_1.0mm 230.06,634.048 r0 top
TP31 "TESTPAD" TEST_PAD_1.25mm 147.32,666.75 r0 top
TP32 "TESTPAD" TEST_PAD_1.0mm 230.06,636.587 r0 top
TP33 "TESTPAD" TEST_PAD_1.25mm 168.275,665.163 r0 top
TP34 "TESTPAD" TEST_PAD_1.0mm 230.06,631.19 r0 top
TP35 "TESTPAD" TEST_PAD_1.0mm 311.467,662.94 r0 top
TP36 "TESTPAD" TEST_PAD_1.0mm 326.707,662.94 r0 top
TP37 "TESTPAD" TEST_PAD_1.50mm 337.82,636.905 r0 top
TP38 "TESTPAD" TEST_PAD_1.50mm 345.757,636.905 r0 top
TP39 "TESTPAD" TEST_PAD_1.50mm 270.192,633.095 r0 top
TP40 "TESTPAD" TEST_PAD_1.0mm 255.587,623.887 r0 top
TP41 "TESTPAD" TEST_PAD_1.50mm 279.082,633.095 r0 top
TP42 "TESTPAD" TEST_PAD_1.0mm 252.73,623.887 r0 top
TP43 "TESTPAD" TEST_PAD_1.50mm 341.63,633.095 r0 top
TP44 "TESTPAD" TEST_PAD_1.0mm 250.19,623.887 r0 top
TP45 "TESTPAD" TEST_PAD_1.50mm 337.82,633.095 r0 top
TP46 "TESTPAD" TEST_PAD_1.0mm 247.65,623.887 r0 top
TP47 "TESTPAD" TEST_PAD_1.25mm 379.73,653.732 r90 top
TP48 "TESTPAD" TEST_PAD_1.25mm 373.38,653.732 r90 top
TP49 "TESTPAD" TEST_PAD_1.25mm 379.73,661.67 r90 top
TP50 "TESTPAD" TEST_PAD_1.25mm 373.38,661.67 r90 top
TP51 "TESTPAD" TEST_PAD_1.25mm 379.73,669.607 r90 top
TP52 "TESTPAD" TEST_PAD_1.25mm 373.38,666.75 r90 top
TP53 "TESTPAD" TEST_PAD_1.25mm 379.73,677.862 r180 top
TP54 "TESTPAD" TEST_PAD_1.25mm 373.38,677.862 r90 top
TP55 "TESTPAD" TEST_PAD_1.25mm 379.73,685.8 r180 top
TP56 "TESTPAD" TEST_PAD_1.25mm 373.38,685.8 r90 top
TP57 "TESTPAD" TEST_PAD_1.25mm 379.73,656.272 r180 top
TP58 "TESTPAD" TEST_PAD_1.25mm 373.38,656.272 r180 top
TP59 "TESTPAD" TEST_PAD_1.25mm 379.73,664.21 r180 top
TP60 "TESTPAD" TEST_PAD_1.25mm 373.38,664.21 r180 top
TP61 "TESTPAD" TEST_PAD_1.25mm 379.73,672.147 r180 top
TP62 "TESTPAD" TEST_PAD_1.25mm 352.107,671.512 r180 top
TP63 "TESTPAD" TEST_PAD_1.25mm 379.73,680.402 r180 top
TP64 "TESTPAD" TEST_PAD_1.25mm 373.38,680.402 r90 top
TP65 "TESTPAD" TEST_PAD_1.25mm 379.73,688.34 r180 top
TP66 "TESTPAD" TEST_PAD_1.25mm 373.38,688.34 r180 top
TP67 "TESTPAD" TEST_PAD_1.0mm 308.928,655.32 r0 top
TP68 "TESTPAD" TEST_PAD_1.0mm 308.928,657.86 r0 top
TP69 "TESTPAD" TEST_PAD_1.0mm 313.69,654.367 r0 top
TP70 "TESTPAD" TEST_PAD_1.0mm 316.23,654.367 r0 top
TP71 "TESTPAD" TEST_PAD_1.0mm 313.69,651.827 r0 top
TP72 "TESTPAD" TEST_PAD_1.0mm 320.04,654.367 r0 top
TP73 "TESTPAD" TEST_PAD_1.0mm 316.23,651.827 r0 top
TP74 "TESTPAD" TEST_PAD_1.0mm 323.85,654.367 r0 top
TP75 "TESTPAD" TEST_PAD_1.0mm 323.85,651.827 r0 top
TP76 "TESTPAD" TEST_PAD_1.0mm 326.707,654.367 r0 top
TP77 "TESTPAD" TEST_PAD_1.0mm 315.277,662.94 r0 top
TP78 "TESTPAD" TEST_PAD_1.0mm 319.087,662.94 r0 top
TP79 "TESTPAD" TEST_PAD_1.0mm 322.897,662.94 r0 top
TP80 "TESTPAD" TEST_PAD_1.0mm 232.727,629.602 r0 top
TP81 "TESTPAD" TEST_PAD_1.50mm 125.412,631.507 r0 top
TP82 "TESTPAD" TEST_PAD_1.0mm 225.425,613.41 r0 top
TP83 "TESTPAD" TEST_PAD_1.0mm 218.44,615.632 r0 top
TP84 "TESTPAD" TEST_PAD_1.50mm 208.28,643.572 r0 top
TP85 "TESTPAD" TEST_PAD_1.50mm 179.705,684.847 r0 top
TP86 "TESTPAD" TEST_PAD_1.25mm 164.147,686.435 r0 top
TP87 "TESTPAD" TEST_PAD_1.50mm 179.705,690.562 r0 top
TP88 "TESTPAD" TEST_PAD_1.50mm 120.332,668.655 r0 top
TP89 "TESTPAD" TEST_PAD_1.50mm 129.54,661.352 r0 top
TP90 "TESTPAD" TEST_PAD_1.50mm 97.472,654.685 r0 top
TP91 "TESTPAD" TEST_PAD_1.50mm 87.63,664.527 r0 top
TP92 "TESTPAD" TEST_PAD_1.50mm 93.662,664.527 r0 top
TP93 "TESTPAD" TEST_PAD_1.50mm 129.222,650.24 r0 top
TP94 "TESTPAD" TEST_PAD_1.50mm 127.317,683.26 r0 top
TP95 "TESTPAD" TEST_PAD_1.0mm 230.188,642.938 r0 top
TP96 "TESTPAD" TEST_PAD_1.0mm 230.06,646.811 r0 top
TP97 "TESTPAD" TEST_PAD_1.0mm 223.52,641.985 r0 top
TP98 "TESTPAD" TEST_PAD_1.0mm 217.805,641.985 r0 top
TP99 "TESTPAD" TEST_PAD_1.50mm 173.355,671.195 r0 top
TP100 "TESTPAD" TEST_PAD_1.0mm 230.06,624.84 r0 top
TP101 "TESTPAD" TEST_PAD_1.0mm 225.425,623.125 r0 top
TP102 "TESTPAD" TEST_PAD_1.50mm 105.41,646.112 r0 top
TP103 "TESTPAD" TEST_PAD_1.0mm 230.06,621.347 r0 top
TP104 "TESTPAD" TEST_PAD_1.0mm 225.425,619.633 r0 top
TP105 "TESTPAD" TEST_PAD_1.50mm 87.3,646.2 r0 top
TP106 "TESTPAD" TEST_PAD_1.0mm 230.06,628.332 r0 top
TP107 "TESTPAD" TEST_PAD_1.0mm 225.425,626.618 r0 top
TP108 "TESTPAD" TEST_PAD_1.50mm 135.255,646.112 r0 top
TP109 "TESTPAD" TEST_PAD_1.0mm 246.38,659.956 r0 top
TP110 "TESTPAD" TEST_PAD_1.0mm 236.537,662.305 r0 top